# Altium PCB SUBBOARD-phase_leg_3p_2L.PcbDoc (part 2 of 2)
Units mm, origin at the board's own origin, x right, y up, seen from the top; angles counter-clockwise.
Board outline 115.25 x 128.45 mm, 2 copper layers (Top Layer, Bottom Layer), stack 1.569 mm thick; 86 components, 43 nets, 270 pads, 85 vias.
Unrouted connection lines stored in the file: 3.
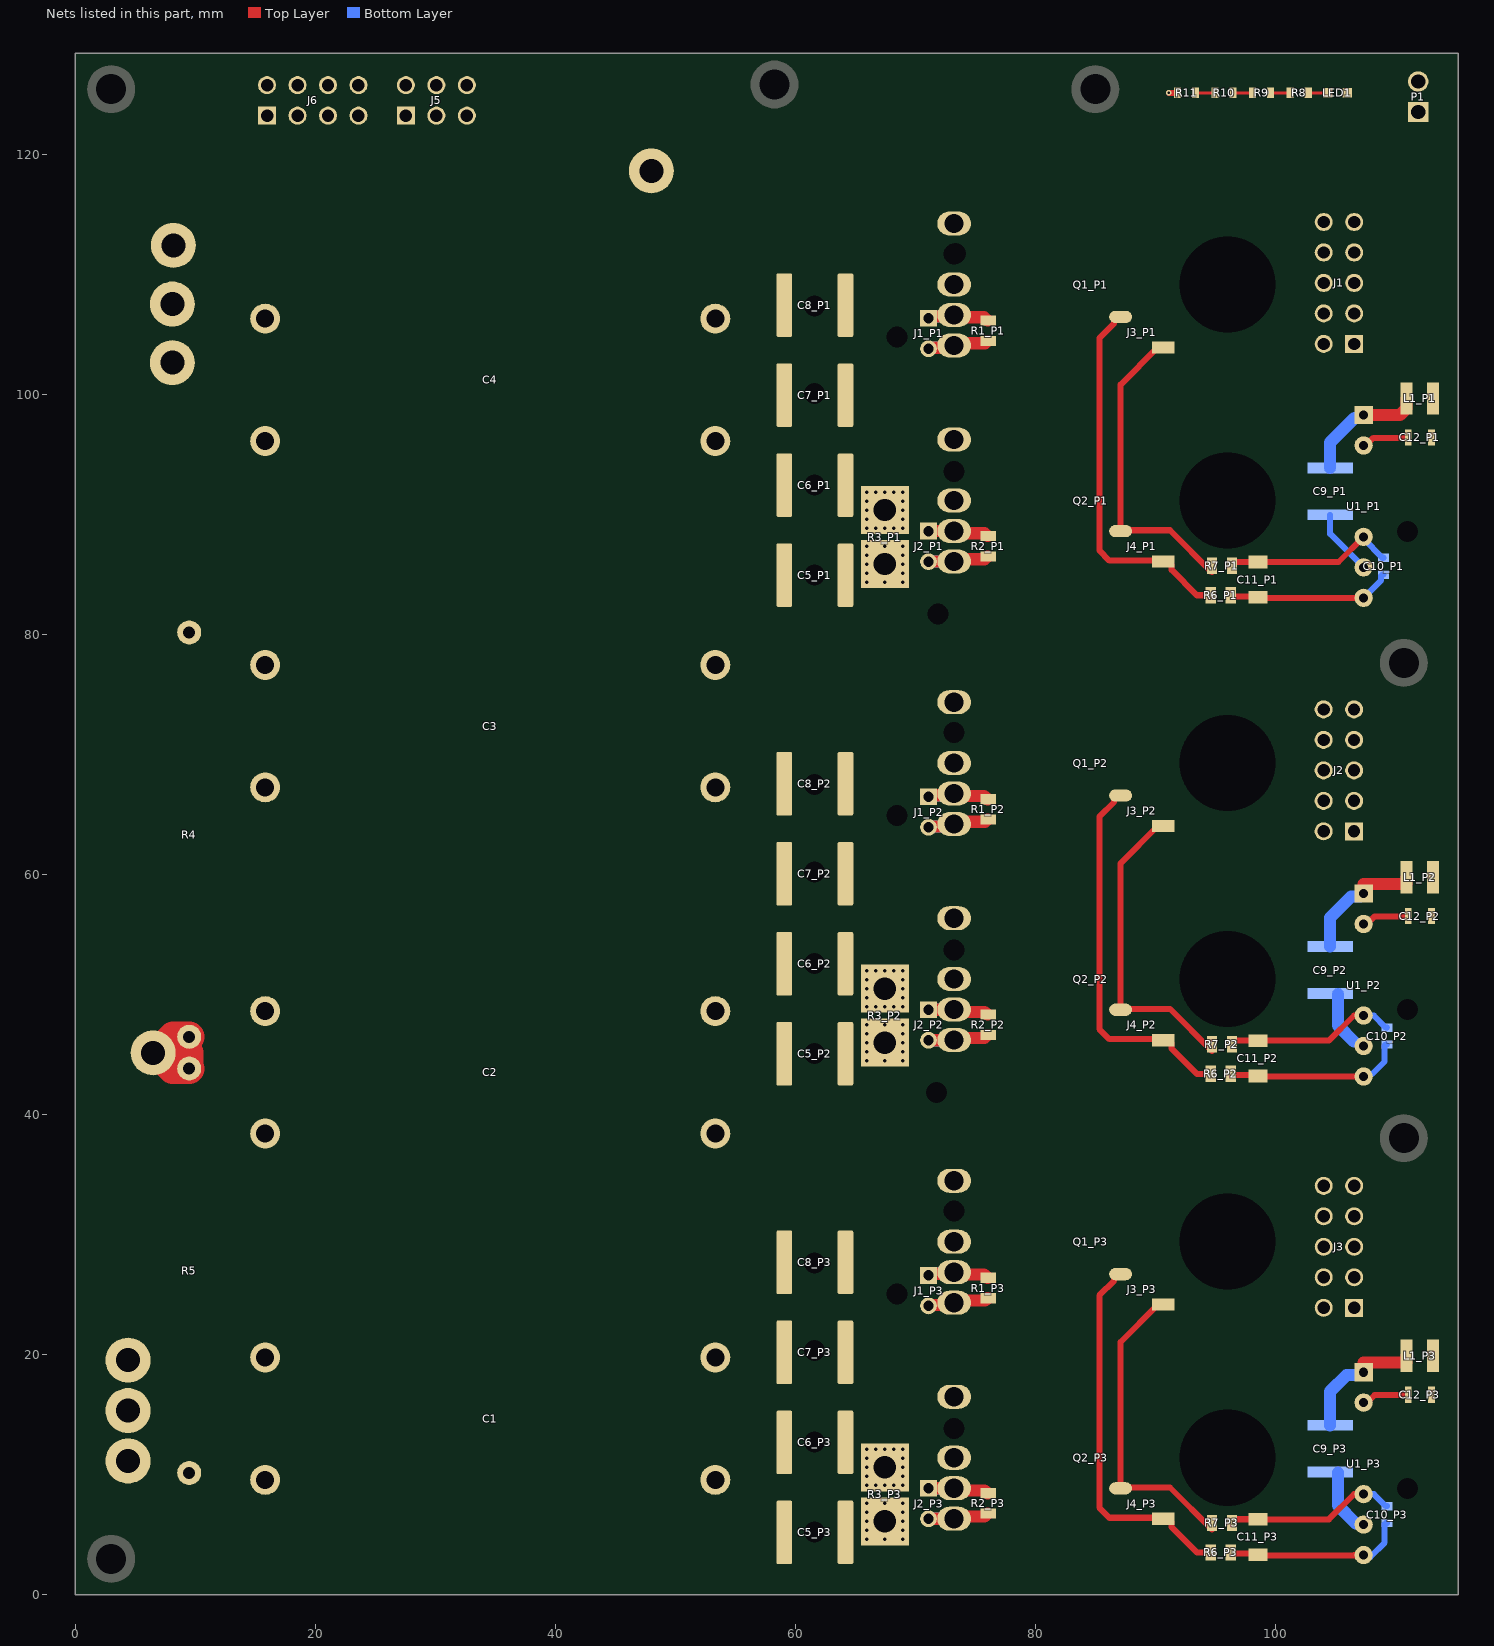
[diagram p2: the nets of this part, all layers, seen from the top]

## Part data
C1 C2 C3 C4: "Film Capacitors 5uF 5% 1000volts 4pins 37.5mm LS", Capacitance="5 uF", Manufacturer=Vishay, Supplier Part Number 1=75-MKP1848S55010JP4B, Tolerance="5 %", Voltage Rating DC="1000 V", ESR="11.5 mOhm", Number of Pins=4, Supplier 1=Mouser
C5_P1 C5_P2 C5_P3: "KEMET - C2220C102JGGACTU - KONDENSATOR 1000PF 2 KV 5% C0G/NP0 2220", Capacitance=1nF, Case Code (Imperial)=2220, Case Code (Metric)=5750, Dielectric=C0G, Dielectric Material=Ceramic, Manufacturer=KEMET, Max Operating Temperature=125°C, Min Operating Temperature=-55°C, Package Quantity=1, Supplier Part Number 1=399-7308-1-ND, Temperature Coefficient=30ppm/°C, Tolerance=5%, Voltage Rating=2kV, Case/Package=2220, Category="Ceramic Capacitors", ComponentLink1Description=https://datasheet.ciiva.com/5904/1698768-5904864.pdf?src-supplier=Farnell, ComponentLink1URL=https://datasheet.ciiva.com/5904/1698768-5904864.pdf?src-supplier=Farnell, ComponentLink2Description=https://datasheet.ciiva.com/7807/1698768-7807429.pdf?src-supplier=Element14, ComponentLink2URL=https://datasheet.ciiva.com/7807/1698768-7807429.pdf?src-supplier=Element14, ComponentLink3Description=https://datasheet.ciiva.com/7807/1698768-7807430.pdf?src-supplier=Element14, ComponentLink3URL=https://datasheet.ciiva.com/7807/1698768-7807430.pdf?src-supplier=Element14, Depth=5mm, Lead Free="Lead Free", Length=0.224inch, Manufacturer Part Number=C2220C102JGGACTU, Mount="Surface Mount", Packaging="Cut Tape", Pricing 1="1=4,95000, 10=4,45600, 50=3,86220, 100=3,36710, 500=2,77292 (USD)", REACH SVHC="No SVHC", RoHS=Yes, Stock 1=706, Supplier 1=Digi-Key, Supplier 2=Digi-Key, Supplier 3=Newark, Supplier 4=Mouser, Supplier 5=Arrow, Supplier 6=Newark, Supplier 7=Farnell, Supplier Part Number 2=399-7308-6-ND, Supplier Part Number 3=08R5595, Supplier Part Number 4=80-C2220C102JGG, Supplier Part Number 5=C2220C102JGGACTU, Supplier Part Number 6=67R5592, Supplier Part Number 7=1702176, Thickness=0.071inch, Voltage Rating (DC)=2kV, Width=0.197inch
C6_P1 C6_P2 C6_P3: "Cap Ceramic 0.01uF 1000V X7R 10% SMD 2220 125C Plastic T/R", Capacitance=10nF, Case Code (Imperial)=2220, Case Code (Metric)=5750, Dielectric=X7R, Dielectric Material=Ceramic, Manufacturer=KEMET, Max Operating Temperature=125°C, Min Operating Temperature=-55°C, Package Quantity=1, Supplier Part Number 1=399-7309-1-ND, Tolerance=10%, Voltage Rating=1kV, Case/Package=2220, Category="Ceramic Capacitors", ComponentLink1Description=https://datasheet.ciiva.com/7807/1499186-7807431.pdf?src-supplier=Element14, ComponentLink1URL=https://datasheet.ciiva.com/7807/1499186-7807431.pdf?src-supplier=Element14, ComponentLink2Description=https://datasheet.ciiva.com/7807/1499186-7807432.pdf?src-supplier=Element14, ComponentLink2URL=https://datasheet.ciiva.com/7807/1499186-7807432.pdf?src-supplier=Element14, Depth=5mm, Height=1.4mm, Length=0.224inch, Manufacturer Part Number=C2220C103KDRACTU, Mount="Surface Mount", Packaging="Cut Tape", Pricing 1="1=4,39000, 10=3,54400, 50=3,04760, 100=2,76400, 500=2,05532 (USD)", REACH SVHC="No SVHC", RoHS=Yes, Stock 1=4957, Supplier 1=Digi-Key, Supplier 2=Digi-Key, Supplier 3=Digi-Key, Supplier 4=Newark, Supplier 5=Mouser, Supplier 6=Arrow, Supplier 7=Farnell, Supplier Part Number 2=399-7309-6-ND, Supplier Part Number 3=399-7309-2-ND, Supplier Part Number 4=08R5596, Supplier Part Number 5=80-C2220C103KDR, Supplier Part Number 6=C2220C103KDRACTU, Supplier Part Number 7=1702182, Thickness=0.061inch, Voltage Rating (DC)=1kV, Width=0.197inch
C7_P1 C7_P2 C7_P3 C8_P1 C8_P2 C8_P3: "CAP CER 0.1UF 1KV X7R 2220", Capacitance=100nF, Case Code (Imperial)=2220, Case Code (Metric)=5750, Dielectric=X7R, Dielectric Material=Ceramic, Manufacturer=KEMET, Max Operating Temperature=125°C, Min Operating Temperature=-55°C, Package Quantity=500, Supplier Part Number 1=399-10490-1-ND, Tolerance=10%, Voltage Rating=1kV, Case/Package=2220, Category="Ceramic Capacitors", ComponentLink1Description=http://www.farnell.com/datasheets/2316241.pdf?src-supplier=Farnell, ComponentLink1URL=http://www.farnell.com/datasheets/2316241.pdf?src-supplier=Farnell, ComponentLink2Description=http://www.mouser.com/ds/2/212/KEM_C1010_X7R_HV_SMD-345925.pdf?src-supplier=Mouser, ComponentLink2URL=http://www.mouser.com/ds/2/212/KEM_C1010_X7R_HV_SMD-345925.pdf?src-supplier=Mouser, ComponentLink3Description=http://www.kemet.com/docfinder?Partnumber=C2220C104KDRACTU&src-supplier=Digi-Key, ComponentLink3URL=http://www.kemet.com/docfinder?Partnumber=C2220C104KDRACTU&src-supplier=Digi-Key, ComponentLink4Description=https://api.kemet.com/component-edge/download/datasheet/C2220C104KDRACTU.pdf?src-supplier=Digi-Key, ComponentLink4URL=https://api.kemet.com/component-edge/download/datasheet/C2220C104KDRACTU.pdf?src-supplier=Digi-Key, ComponentLink5Description=http://www.kemet.com/Lists/ProductCatalog/Attachments/53/KEM_C1002_X7R_SMD.pdf?src-supplier=Avnet, ComponentLink5URL=http://www.kemet.com/Lists/ProductCatalog/Attachments/53/KEM_C1002_X7R_SMD.pdf?src-supplier=Avnet, Length=0.224inch, Manufacturer Part Number=C2220C104KDRACTU, Mount="Surface Mount", Packaging="Tape and Reel", Pricing 1="1=1,15000, 10=0,90600, 50=0,78500, 100=0,67940 (USD)", RoHS=Yes, Stock 1=1165, Supplier 1=Digi-Key, Supplier 2=Digi-Key, Supplier 3=Digi-Key, Supplier 4=Avnet, Supplier 5=Mouser, Supplier 6=Newark, Supplier 7=Arrow, Supplier 8=Farnell, Supplier Part Number 2=399-10490-6-ND, Supplier Part Number 3=399-10490-2-ND, Supplier Part Number 4=C2220C104KDRACTU, Supplier Part Number 5=80-C2220C104KDR, Supplier Part Number 6=05AC8309, Supplier Part Number 7=C2220C104KDRACTU, Supplier Part Number 8=2676644, Termination=SMD/SMT, Thickness=0.087inch, Voltage Rating (DC)=1kV, Width=0.197inch
C9_P1 C9_P2 C9_P3: "CAP CER 470PF 250VAC X7R 1812", Capacitance=470pF, Case Code (Imperial)=1812, Case Code (Metric)=4532, Manufacturer="Wurth Electronics", Max Operating Temperature=125°C, Min Operating Temperature=-55°C, Ratings=X1,Y2, Supplier Part Number 1=710-885352211001, Tolerance=10%, Case/Package=1812, Category="Ceramic Capacitors", ComponentLink1Description=https://katalog.we-online.de/pbs/datasheet/885352211001.pdf?src-supplier=Digi-Key, ComponentLink1URL=https://katalog.we-online.de/pbs/datasheet/885352211001.pdf?src-supplier=Digi-Key, Length=0.177inch, Manufacturer Part Number=885352211001, Mount="Surface Mount", Packaging="Cut Tape", Pricing 1="1=0,74000, 25=0,73600, 50=0,60400, 100=0,51200, 250=0,43700, 500=0,36700 (USD)", RoHS=Yes, Stock 1=1066, Supplier 1=Mouser, Supplier 2=Digi-Key, Supplier 3=Digi-Key, Supplier 4=Digi-Key, Supplier Part Number 2=732-8853522110011CT-ND, Supplier Part Number 3=732-8853522110011DKR-ND, Supplier Part Number 4=732-8853522110011TR-ND, Thickness=0.071inch, Width=0.125inch
C10_P1 C10_P2 C10_P3: library part CMP-1035-02591-1, "CAP 100nF 50V ±5% 0603 (1608 Metric) Thickness 1mm SMD", Case-EIA=0603, Case-Metric=1608, Rated Voltage="50 V", Tolerance=Â±5%, Max Thickness="1 mm", Technology=SMT
C11_P1 C11_P2 C11_P3: library part CMP-06035-000076-1, "CAP CER 10UF 50V X5R 1206", Capacitance=10uF, Manufacturer=Murata, Package=GRT31-0.2, Temperature="-55°C to +85°C", Temperature Characteristic=X5R, Temperature Coefficient=15%, Temperature Range High=+85°C, Temperature Range Low=-55°C, Tolerance=10%, Voltage Rating=50V, Automotive=Yes, Automotive Grade="Grade 3", Category=Cap, ComponentLink2Description=Datasheet, ComponentLink2URL=https://search.murata.co.jp/Ceramy/image/img/A01X/G101/ENG/GRT31CR61H106KE01-01.pdf, Device Class L1="Passive Components", Device Class L2=Capacitors, Device Class L3="Ceramic Capacitors", Digikey Description="CAP CER 10UF 50V X5R 1206", Height=1.8mm, Ipc Land Pattern Name=CAPC320160X160, Lead Free=Yes, Manufacturer Part Number=GRT31CR61H106KE01L, Material=Ceramic, Octopart=https://octopart.com/grt31cr61h106ke01l-murata-62921736, RoHS=TRUE
C12_P1 C12_P2 C12_P3: library part CMP-2000-06040-1, "Chip Capacitor, 2.2 uF, +/- 10%, 50 V, -55 to 125 degC, 0805 (2012 Metric), RoHS, Tape and Reel", Capacitance=2.2µF, Manufacturer=TDK, Operating Temperature=-55°C~125°C, Package / Case=0805(2012Metric), Package Description="2-Pin Surface Mount Device, Body 2 x 1.25 mm", Package Reference=0805, PCN Part Number=MLCCPartNumberChange30/Nov/2012, Ratings=-, Standard Package=1, Temperature Coefficient=X7R, Tolerance=±10%, Voltage - Rated=50V, Applications=GeneralPurpose, Catalog Drawings=CSERIES_2012-0805_1.45, Category=Capacitors, Datasheet URL=https://datasheet.ciiva.com/24216/c2012x7r1h225k125ac-265016-24216364.pdf, Datasheet Version=09/2013, Family=CeramicCapacitors, Features=-, Height - Seated (Max)=-, Kits=445-9015-KIT-ND-KITMLCC1000PF-47UF080510-50V445-9003-KIT-ND-KITCAPCERHICAPMLCCSMD445-173086-KIT-ND-C0402-2220X7R6.3-50V1,000PF-, Lead Spacing=-, Lead Style=-, Manufacturer URL=http://www.tdk.com/, Mounting Technology=SurfaceMount, Mounting Type=SurfaceMount,MLCC, Online Catalog=CSeries,GeneralPurpose, Other Names=445-5968-1, Packaging=CutTape(CT), Product Training Modules=CSeriesGeneralApplicationsSEAT,CCV,andTVCLDesignToolsGuidetoReplacinganElectrolyticCapacitorwithanMLCC, RoHS Information=RoHSCertificate-MLCC, Series=C, Size / Dimension="0.079\"Lx0.049\"W(2.00mmx1.25mm)", Thickness (Max)="0.057\"(1.45mm)"
J1 J2 J3: "SAMTEC         IPS1-105-01-L-D-RA             Board-To-Board Connector, Right Angle, IPS1 Series, 10 Contacts, Receptacle, 2.54 mm, Through Hole", Current Rating=9A, Manufacturer=Samtec, Max Operating Temperature=125°C, Max Voltage Rating (AC)=550V, Min Operating Temperature=-55°C, Supplier Part Number 1=SAM9620-ND, Voltage Rating=777V, Category=Connectors, ComponentLink1Description=https://datasheet.ciiva.com/25618/0900766b8114c2ed-25618027.pdf?src-supplier=RSComponents, ComponentLink1URL=https://datasheet.ciiva.com/25618/0900766b8114c2ed-25618027.pdf?src-supplier=RSComponents, ComponentLink2Description=https://datasheet.ciiva.com/9444/ipt1-9444586.pdf?src-supplier=Avnet, ComponentLink2URL=https://datasheet.ciiva.com/9444/ipt1-9444586.pdf?src-supplier=Avnet, Contact Material=Bronze, Contact Plating=Gold, Depth=8.51mm, Gender=Receptacle, Housing Material=Polymer, Length=13.08mm, Manufacturer Part Number=IPS1-105-01-L-D-RA, Mount="Through Hole,Surface Mount", Number of Contacts=10, Number of Ports=1, Number of Rows=2, Number of Terminals=10, Orientation="Right Angle", Packaging=Bulk, Pitch=2.54mm, Pricing 1="1=2.75000, 10=2.64000, 100=2.20000, 500=1.87000, 1000=1.59500, 5000=1.43000 (USD)", Radiation Hardening=No, REACH SVHC="No SVHC", RoHS=Yes, Stock 1=364, Supplier 1=Digi-Key, Termination=Solder
J1_P1 J1_P2 J1_P3 J2_P1 J2_P2 J2_P3: library part CMP-1023-00124-1, "Low Profile Socket Strips, Through-hole, Vertical, -55 to 105 degC, 2.54 mm Pitch, 2-Pin, Female, RoHS", Manufacturer=Samtec, Temperature Range="-55 to 105 degC", ComponentLink1Description="Manufacturer URL", ComponentLink1URL=http://www.samtec.com, ComponentLink2Description=Datasheet, ComponentLink2URL=http://www.samtec.com/documents/webfiles/pdf/SLW.PDF, ComponentLink3Description="Package Specification", ComponentLink3URL=http://www.samtec.com/documents/webfiles/cpdf/SLW-1XX-01-X-X-MKT.pdf, DatasheetVersion=F-214, Mounting Technology=Through-hole, Orientation=Vertical, PackageDescription="Low Profile Socket Strip", PackageReference=SLW-102-01-X-S, PackageVersion="X, 9/1987", PartNumber=SLW-102-01-T-S, Pitch="2.54 mm", RoHS=True, System=Connector
J3_P1 J3_P2 J3_P3 J4_P1 J4_P2 J4_P3: "SAMTEC - SSM-102-L-SV - RECEPTACLE, 2.54MM, VERT, 2WAY", Color=Black, Contact Resistance=10mR, Current Rating=6.9A, Manufacturer=Samtec, Max Operating Temperature=125°C, Max Voltage Rating (AC)=475V, Min Operating Temperature=-55°C, Supplier Part Number 1=SAM1148-02-ND, Category="Headers and Wire Housings", ComponentLink1Description=https://datasheet.ciiva.com/25617/0900766b811594ab-25617394.pdf?src-supplier=RSComponents, ComponentLink1URL=https://datasheet.ciiva.com/25617/0900766b811594ab-25617394.pdf?src-supplier=RSComponents, ComponentLink2Description=https://datasheet.ciiva.com/746/ssm-1xx-xxx-xx-xx-xx-x-xx-xx-mkt-746741.pdf?src-supplier=Digi-Key, ComponentLink2URL=https://datasheet.ciiva.com/746/ssm-1xx-xxx-xx-xx-xx-x-xx-xx-mkt-746741.pdf?src-supplier=Digi-Key, ComponentLink3Description=https://datasheet.ciiva.com/22677/81944-22677814.pdf?src-supplier=Element14, ComponentLink3URL=https://datasheet.ciiva.com/22677/81944-22677814.pdf?src-supplier=Element14, Connector Type=Receptacle,Socket, Contact Material=Bronze, Contact Plating=Gold, Depth=2.54mm, Gender=Receptacle, Housing Color=Black, Housing Material=Polymer, Lead Free="Lead Free", Lead Pitch=2.54mm, Length=5.08mm, Manufacturer Part Number=SSM-102-L-SV, Max Current Rating=6.9A, Mount="Surface Mount", Number of Contacts=2, Number of Positions=2, Number of Rows=1, Orientation=Straight, Packaging=Bulk, Pitch=2.54mm, Pricing 1="1=0.56000, 10=0.52100, 25=0.46920, 50=0.41700, 100=0.39960, 250=0.36488, 500=0.34752 (USD)", Pricing 2="1=0.53350, 1=0.47880, 12500=0.42240, 25000=0.36600, 125000=0.31770, 250000=0.29990 (USD)", Pricing 3="1=0.92000, 10=0.73100, 100=0.63600, 500=0.57200, 1000=0.50800, 2500=0.44500 (USD)", Radiation Hardening=No, REACH SVHC="No SVHC", RoHS=Yes, Stock 1=51, Stock 2=1, Stock 3=175, Supplier 1=Digi-Key, Supplier 2=Arrow, Supplier 3=Mouser, Supplier Part Number 2=SSM-102-L-SV, Supplier Part Number 3=200-SSM102LSV, System=Connector, Termination=Solder, Voltage Rating=475V, Voltage Rating (AC)=475V
J5: "Conn Socket Strip SKT 6 POS 2.54mm Solder ST Thru-Hole", Color=Black, Contact Resistance=10mR, Current Rating=6.9A, Manufacturer=Samtec, Max Operating Temperature=125°C, Max Voltage Rating (AC)=550V, Min Operating Temperature=-55°C, Supplier Part Number 1=SAM1208-03-ND, Category="Headers and Wire Housings", ComponentLink1Description=https://datasheet.ciiva.com/25617/0900766b8115c03d-25617399.pdf?src-supplier=RSComponents, ComponentLink1URL=https://datasheet.ciiva.com/25617/0900766b8115c03d-25617399.pdf?src-supplier=RSComponents, ComponentLink2Description=https://datasheet.ciiva.com/22677/82032-22677622.pdf?src-supplier=Element14, ComponentLink2URL=https://datasheet.ciiva.com/22677/82032-22677622.pdf?src-supplier=Element14, ComponentLink3Description=https://datasheet.ciiva.com/749/ssw-1xx-xx-xxx-x-xx-xxx-xx-mkt-749828.pdf?src-supplier=Digi-Key, ComponentLink3URL=https://datasheet.ciiva.com/749/ssw-1xx-xx-xxx-x-xx-xxx-xx-mkt-749828.pdf?src-supplier=Digi-Key, Connector Type=Receptacle,Socket, Contact Material=Bronze, Contact Plating=Gold, Depth=4.95mm, Gender=Receptacle, Housing Color=Black, Housing Material=Polymer, Lead Free="Lead Free", Length=8.13mm, Manufacturer Part Number=SSW-103-01-G-D, Mating Cycles=100, Max Current Rating=6.9A, Mount="Through Hole", Number of Contacts=6, Number of Positions=6, Number of Rows=2, Orientation=Vertical, Packaging=Bulk, Pitch=2.54mm, Pricing 1="1=0.93000, 10=0.82100, 25=0.77240, 50=0.74020, 100=0.70800, 250=0.64368, 500=0.57932 (USD)", Pricing 2="1=0.94640, 1=0.93000, 4167=0.71590, 8334=0.59720, 41667=0.52200, 83334=0.49330 (USD)", Pricing 3="1=1.35000, 10=1.10000, 100=0.98200, 250=0.91700, 500=0.79200, 1000=0.69000 (USD)", Radiation Hardening=No, REACH SVHC="No SVHC", RoHS=Yes, Row Spacing=0.1inch, Stock 1=1397, Stock 2=1, Stock 3=388, Supplier 1=Digi-Key, Supplier 2=Arrow, Supplier 3=Mouser, Supplier Part Number 2=SSW-103-01-G-D, Supplier Part Number 3=200-SSW10301GD, Termination=Solder, Voltage Rating=550V
J6: "Conn Socket Strip SKT 8 POS 2.54mm Solder ST Thru-Hole", Color=Black, Contact Resistance=10mR, Current Rating=6.9A, Manufacturer=Samtec, Max Operating Temperature=125°C, Max Voltage Rating (AC)=550V, Min Operating Temperature=-55°C, Supplier Part Number 1=SAM1208-04-ND, Category="Headers and Wire Housings", ComponentLink1Description=https://datasheet.ciiva.com/25617/0900766b8115c03d-25617355.pdf?src-supplier=RSComponents, ComponentLink1URL=https://datasheet.ciiva.com/25617/0900766b8115c03d-25617355.pdf?src-supplier=RSComponents, ComponentLink2Description=https://datasheet.ciiva.com/22677/82032-22677624.pdf?src-supplier=Element14, ComponentLink2URL=https://datasheet.ciiva.com/22677/82032-22677624.pdf?src-supplier=Element14, ComponentLink3Description=https://datasheet.ciiva.com/749/ssw-1xx-xx-xxx-x-xx-xxx-xx-mkt-749827.pdf?src-supplier=Digi-Key, ComponentLink3URL=https://datasheet.ciiva.com/749/ssw-1xx-xx-xxx-x-xx-xxx-xx-mkt-749827.pdf?src-supplier=Digi-Key, Connector Type=Receptacle,Socket, Contact Material=Bronze, Contact Plating=Gold, Depth=4.95mm, Gender=Receptacle, Housing Color=Black, Housing Material=Polymer, Lead Free="Lead Free", Length=10.67mm, Manufacturer Part Number=SSW-104-01-G-D, Mating Cycles=100, Max Current Rating=6.9A, Mount="Through Hole", Number of Contacts=8, Number of Positions=8, Number of Rows=2, Orientation=Vertical, Packaging=Bulk, Pitch=2.54mm, Pricing 1="1=1.24000, 10=1.09400, 25=1.03000, 50=0.98700, 100=0.94410, 250=0.85824, 500=0.77242 (USD)", Radiation Hardening=No, REACH SVHC="No SVHC", RoHS=Yes, Row Spacing=0.1inch, Stock 1=1152, Supplier 1=Digi-Key, Termination=Solder, Voltage Rating=550V
L1_P1 L1_P2 L1_P3: library part CMP-0007-00006-1, "Semi-shielded Power Inductor, 47 uH, +/- 20%, 0.4 A, -40 to 125 degC, 3 x 3 x 1.5 mm SMD, RoHS and Halogen Free, Tape and Reel", Inductance="47 uH", Inductance Tolerance="+/- 20%", Manufacturer=Bourns, Operating Temperature="-40 to 125 degC", Rated Current="0.4 A", Resistance to Solder Heat="+260 degC for 10 sec.", ComponentLink1Description="Manufacturer URL", ComponentLink1URL=http://www.bourns.com/, ComponentLink2Description=Datasheet, ComponentLink2URL=http://www.bourns.com/data/global/pdfs/SRN3015.pdf, ComponentLink3Description="Package Specification", ComponentLink3URL=http://www.bourns.com/data/global/pdfs/SRN3015.pdf, DatasheetVersion=Aug-11, DCR Max="1.406 Ohm", Isat="0.38 A", Mounting Technology="Surface Mount", PackageDescription="2-Pin SMD, Body 3 x 3 mm, Height 1.5 mm", PackageReference=SRN3015, Packing="Tape and Reel", PartNumber=SRN3015-470M, RoHS=TRUE, SRF Min="18 MHz"
LED1: library part CMP-1426-00003-1, "SMD mono-color Chip LED, WL-SMCW, Blue", Color=Blue, Manufacturer="Wuerth Elektronik", ComponentLink1Description="Manufacturer URL", ComponentLink1URL=http://www.we-online.com, ComponentLink2Description=Datasheet, ComponentLink2URL=http://katalog.we-online.com/led/datasheet/150060BS75000.pdf, PackageReference=0603_A, PartNumber=150060BS75000
MH1 MH2 MH3 MH4 MH5 MH6: "matching hole 2.5 hole, 4mm pad (round)"
P1: library part CMP-2000-05537-1, "Male Header, Pitch 2.54 mm, 1 x 2 Position, Height 11.7 mm, Tail Length 3.56 mm, 0 to 75 degC, RoHS, Bulk", Current - Max=4A, Manufacturer=Molex, Operating Temperature=0°Cto+75°C, Package Description="2-Leads Header, Body 5.08 x 5.8 mm, Pitch 2.54 mm", Package Version="Rev. BC, 02/2012", PartNumber=0022272021, Voltage - Max=250V, Contact Material=Tinplatedbrass, Current Rating=4A, Datasheet URL=http://www.molex.com/pdm_docs/sd/022272021_sd.pdf, Datasheet Version="Rev. F, 06/2009", Housing Material=Nylon(UL94V-0), Manufacturer URL=http://www.molex.com/, Mounting Technology=ThroughHole, No. of Positions=2, No. of Rows=1, Orientation=Vertical, Package Reference=22-27-2021, Pitch=2.54mm, Voltage Rating=250V
Q1_P1 Q1_P2 Q1_P3 Q2_P1 Q2_P2 Q2_P3: "N-channel SiC power MOSFET ROHM. Vdss 1200V, Rdson 105mOhm, Id 24A", Current - Continuous Drain (Id) @ 25°C="24 A", Drain-to-source voltage (Vdss)="1200 V", Drive Voltage="18 V", Input Capacitance (Ciss) (Max) @ Vds="574pF @ 800V", Package/Case=TO-247-4, Supplier Part Number 1=755-SCT3105KRC14, FET Type=N-Channel, Gate Charge (Qg) (Max) @ Vds="51 nC", Rds on @ Id, Vgs="137 mOhm", Supplier 1=Mouser, Supplier 2=Digi-Key, Supplier 3=Farnell, Supplier 4=Newark, Supplier Part Number 2=846-SCT3105KRC14-ND, Supplier Part Number 3=3241766, Supplier Part Number 4=34AH2699, Technology=SiC-FET, Vgs Max="+22 V / -4 V"
R1_P1 R1_P2 R1_P3 R2_P1 R2_P2 R2_P3: library part CMP-1013-00098-1, "10K 0.125W 5% 0805 (2012 Metric)  SMD", Case-EIA=0805, Case-Metric=2012, Power="0.125 W", Tolerance="5 %", Technology=SMT
R3_P1 R3_P2 R3_P3: "Coaxial current shunt SDN-414 T&M (New)", Case/Package=Axial, Manufacturer=Ohmite, Manufacturer Part Number=WHE10RFET, Max Operating Temperature=150°C, Max Power Dissipation=5W, Min Operating Temperature=-55°C, Package Quantity=500, Resistance=10R, Supplier Part Number 1=WHE10RFETCT-ND, Temperature Coefficient=50ppm/°C, Tolerance=1%, Category="Through-Hole Resistors", ComponentLink1Description=https://datasheet.ciiva.com/5635/res-wh-wn-5635598.pdf?src-supplier=Mouser, ComponentLink1URL=https://datasheet.ciiva.com/5635/res-wh-wn-5635598.pdf?src-supplier=Mouser, ComponentLink2Description=https://datasheet.ciiva.com/6495/res-wh-wn-6495224.pdf?src-supplier=Digi-Key, ComponentLink2URL=https://datasheet.ciiva.com/6495/res-wh-wn-6495224.pdf?src-supplier=Digi-Key, ComponentLink3Description=https://datasheet.ciiva.com/6495/res-wh-wn-6495226.pdf?src-supplier=Digi-Key, ComponentLink3URL=https://datasheet.ciiva.com/6495/res-wh-wn-6495226.pdf?src-supplier=Digi-Key, Composition=Wirewound, Diameter=7.5mm, Lead Diameter=1mm, Length=20mm, Number of Pins=2, Number of Terminations=2, Packaging="Tape and Reel", Power rating=5W, Pricing 1="1=1.54000, 10=1.36400, 25=1.25400, 50=1.14400, 100=0.99000, 250=0.83600 (USD)", REACH SVHC=Unknown, RoHS=Yes, Stock 1=228, Supplier 1=Digi-Key, Termination=Axial, Weight=0.080848oz
R4 R5: "Metal Oxide Resistors 5W XSM M/OX 5% 51K", Manufacturer="TE Connectivity", Power="5 W", Supplier Part Number 1=A142841CT-ND, Tolerance="5 %", Diameter="6.5 mm", Length="17.5 mm", Manufacturer Part Number=ROX5SSJ51K, Pricing 1="1=0,66000, 10=0,54900, 25=0,47080, 50=0,42360, 100=0,36880, 250=0,32952 (USD)", RoHS=No, Stock 1=846, Supplier 1=Digi-Key, Supplier 2=Digi-Key, Supplier 3=RSComponents, Supplier 4=Mouser, Supplier 5=Farnell, Supplier Part Number 2=A142841TB-ND, Supplier Part Number 3=1869581, Supplier Part Number 4=279-ROX5SSJ51K, Supplier Part Number 5=3229952
R6_P1 R6_P2 R6_P3 R7_P1 R7_P2 R7_P3: library part CMP-2001-04896-1, Manufacturer="Vishay Dale", Part Number=CRCW08050000Z0EA
R8 R9 R10 R11: library part CRCW0603200RFKEAHP, "CRCW0603200RFKEAHP / Res Thick Film 0603 200 Ohm 1% 0.25W(1/4W) ±100ppm/C Pad SMD Automotive T/R", Case Code (Imperial)=0603, Case Code (Metric)=1608, Manufacturer="Vishay Dale", Max Operating Temperature=155°C, Max Power Dissipation=250mW, Min Operating Temperature=-55°C, Package Quantity=5000, Resistance=200R, Resistor Type="Thick Film", Supplier Part Number 1=541-200SCT-ND, Temperature Coefficient=100ppm/°C, Tolerance=1%, Case/Package=0603, Category="Chip SMD Resistors", ComponentLink1Description=https://datasheet.ciiva.com/2578/crcwhpe3-2578537.pdf?src-supplier=Digi-Key, ComponentLink1URL=https://datasheet.ciiva.com/2578/crcwhpe3-2578537.pdf?src-supplier=Digi-Key, ComponentLink2Description=https://datasheet.ciiva.com/8961/crcwhpe3-8961129.pdf?src-supplier=Avnet, ComponentLink2URL=https://datasheet.ciiva.com/8961/crcwhpe3-8961129.pdf?src-supplier=Avnet, Contact Plating=Tin, Features="Automotive AEC-Q200", Height=0.022inch, Lead Free="Lead Free", Length=0.063inch, Manufacturer Part Number=CRCW0603200RFKEAHP, Mount="Surface Mount", Number of Terminations=2, Packaging="Tape and Reel", Power rating=250mW, Pricing 1="1=0.15000, 10=0.12900, 100=0.05030, 1000=0.02106, 2500=0.01930 (USD)", Radiation Hardening=No, RoHS=Yes, Stock 1=59007, Supplier 1=Digi-Key, Width=0.033inch
U1_P1 U1_P2 U1_P3: "2W DC/DC-Converter 'ECONOLINE' SIP7 6.4kV unreg; V. In: 24; V. Out: +15/-03; mA. Out: +93/-185", Manufacturer=Recom, Max Output Voltage=15V, Supplier Part Number 1=945-3071-5-ND, Category="Voltage Regulators - Switching", Height=12.5mm, Length=19.5mm, Manufacturer Part Number=R24P21503D, Pricing 1="1=8,88000, 5=8,71200, 10=8,64500, 25=8,51200, 50=8,24600, 100=7,61000, 250=7,31500, 500=7,18200 (USD)", RoHS=No, Stock 1=358, Supplier 1=Digi-Key, Supplier 2=RSComponents, Supplier 3=Mouser, Supplier 4="Future Electronics", Supplier 5="Arrow Electronics", Supplier 6=Newark, Supplier Part Number 2=1446041, Supplier Part Number 3=919-R24P21503D, Supplier Part Number 4=R24P21503D-TUBE, Supplier Part Number 5=R24P21503D, Supplier Part Number 6=22AC6462, Weight=4.3g, Width=9.8mm

## Free pads (board coordinates)
  round 3.75 hole 2: 3(4.4,11.15) 3(4.4,15.35) 3(4.4,19.55) 3(6.5,45.16) 3(8.09,102.66) 3(8.09,107.55) 3(8.18,112.44) 3(48,118.65)
  round 0.8 hole 1.75 slot 5.9 at 90 deg unplated: *(61.583,107.384) *(61.583,5.211) *(61.583,12.728) *(61.583,20.338) *(61.583,27.63) *(61.583,45.099) *(61.583,52.616) *(61.583,60.226) *(61.583,67.518) *(61.583,84.965) *(61.583,92.482) *(61.583,100.092)
  round 0.8 hole 1.75 slot 7.8 at 90 deg unplated: *(68.469,64.918) *(68.47,104.815) *(68.471,25.051)
  round 0.8 hole 1.75 slot 11.7 at 0 deg unplated: *(71.75,41.873) *(71.875,81.742)
  round 0.8 hole 1.75 slot 7.1 at 0 deg unplated: *(73.218,71.846) *(73.224,93.597) *(73.225,53.717) *(73.229,31.965) *(73.232,13.845) *(73.24,111.725) *(73.347,111.768)
  round 0.8 hole 1.75 slot 12.8 at 90 deg unplated: *(111.022,88.595) *(111.022,8.835) *(111.022,48.749)

## Via types
v1: diameter 0.5, hole 0.3, Top Layer to Bottom Layer, 84 vias
v2: diameter 0.45, hole 0.2, Top Layer to Bottom Layer, 1 vias

## Nets (pads, with @x,y where several pads share a name; then routed paths per layer and width w, separated by ;. In a path a pad name is that pad's centre, name@x,y a point inside that pad or via, vN(x,y) a via of type N, cw(c..) or ccw(c..) an arc to the next point about the centre after c; other vN are vias at no path point)
G_N1: J2_P1.2 Q2_P1.4 R2_P1.2 | length 7.3
  Top Layer w1.016: J2_P1.2@71.102,86.09 71.106,86.094 73.227,86.094 Q2_P1.4@73.231,86.098 73.419,86.286 75.767,86.286 76.003,86.522 R2_P1.2@76.062,86.522
  Bottom Layer w1.016: J2_P1.2@71.102,86.09 71.106,86.094 73.227,86.094 Q2_P1.4@73.231,86.098
G_N2: J2_P2.2 Q2_P2.4 R2_P2.2 | length 7.3
  Top Layer w1.016: J2_P2.2@71.102,46.21 71.106,46.214 73.227,46.214 Q2_P2.4@73.231,46.218 73.419,46.406 75.767,46.406 76.003,46.642 R2_P2.2@76.062,46.642
  Bottom Layer w1.016: J2_P2.2@71.102,46.21 71.106,46.214 73.227,46.214 Q2_P2.4@73.231,46.218
G_N3: J2_P3.2 Q2_P3.4 R2_P3.2 | length 7.3
  Top Layer w1.016: J2_P3.2@71.102,6.33 71.106,6.334 73.227,6.334 Q2_P3.4@73.231,6.338 73.419,6.526 75.767,6.526 76.003,6.762 R2_P3.2@76.062,6.762
  Bottom Layer w1.016: J2_P3.2@71.102,6.33 71.106,6.334 73.227,6.334 Q2_P3.4@73.231,6.338
G_P1: J1_P1.2 Q1_P1.4 R1_P1.1 | length 7.5
  Top Layer w1.016: J1_P1.2@71.102,103.833 71.175,103.906 72.373,103.906 72.565,104.098 Q1_P1.4@73.231,104.098 73.419,104.286 75.817,104.286 76.003,104.472 R1_P1.1@76.062,104.472
  Bottom Layer w1.016: J1_P1.2@71.102,103.833 71.175,103.906 72.373,103.906 72.565,104.098 Q1_P1.4@73.231,104.098
G_P2: J1_P2.2 Q1_P2.4 R1_P2.1 | length 7.5
  Top Layer w1.016: J1_P2.2@71.102,63.953 71.175,64.026 72.373,64.026 72.565,64.218 Q1_P2.4@73.231,64.218 73.419,64.406 75.817,64.406 76.003,64.592 R1_P2.1@76.062,64.592
  Bottom Layer w1.016: J1_P2.2@71.102,63.953 71.175,64.026 72.373,64.026 72.565,64.218 Q1_P2.4@73.231,64.218
G_P3: J1_P3.2 Q1_P3.4 R1_P3.1 | length 7.5
  Top Layer w1.016: J1_P3.2@71.102,24.073 71.175,24.146 72.373,24.146 72.565,24.338 Q1_P3.4@73.231,24.338 73.419,24.526 75.817,24.526 76.003,24.712 R1_P3.1@76.062,24.712
  Bottom Layer w1.016: J1_P3.2@71.102,24.073 71.175,24.146 72.373,24.146 72.565,24.338 Q1_P3.4@73.231,24.338
GND: C12_P1.2 C12_P2.2 C12_P3.2 P1.1 R11.2 U1_P1.2 U1_P2.2 U1_P3.2 | length 12.7
  Top Layer w0.5: v2(91.125,125.15) R11.2@91.85,125.15 ; U1_P3.2@107.355,16.008 107.632,16.008 108.274,16.65 111.038,16.65 C12_P3.2@111.06,16.672 ; U1_P2.2@107.355,55.888 107.632,55.888 108.244,56.5 111.035,56.5 111.06,56.525 C12_P2.2@111.06,56.552 ; U1_P1.2@107.355,95.768 107.53,95.768 108.16,96.398 111.035,96.398 111.035,96.407 C12_P1.2@111.06,96.432
KS_N1: J2_P1.1 Q2_P1.3 R2_P1.1 | length 7.3
  Top Layer w1.016: J2_P1.1@71.102,88.63 71.106,88.634 73.227,88.634 Q2_P1.3@73.231,88.638 73.419,88.45 75.775,88.45 76.003,88.222 R2_P1.1@76.062,88.222
  Bottom Layer w1.016: J2_P1.1@71.102,88.63 71.106,88.634 73.227,88.634 Q2_P1.3@73.231,88.638
KS_N2: J2_P2.1 Q2_P2.3 R2_P2.1 | length 7.3
  Top Layer w1.016: J2_P2.1@71.102,48.75 71.106,48.754 73.227,48.754 Q2_P2.3@73.231,48.758 73.419,48.57 75.775,48.57 76.003,48.342 R2_P2.1@76.062,48.342
  Bottom Layer w1.016: J2_P2.1@71.102,48.75 71.106,48.754 73.227,48.754 Q2_P2.3@73.231,48.758
KS_N3: J2_P3.1 Q2_P3.3 R2_P3.1 | length 7.3
  Top Layer w1.016: J2_P3.1@71.102,8.87 71.106,8.874 73.227,8.874 Q2_P3.3@73.231,8.878 73.419,8.69 75.775,8.69 76.003,8.462 R2_P3.1@76.062,8.462
  Bottom Layer w1.016: J2_P3.1@71.102,8.87 71.106,8.874 73.227,8.874 Q2_P3.3@73.231,8.878
KS_P1: J1_P1.1 Q1_P1.3 R1_P1.2 | length 7.5
  Top Layer w1.016: J1_P1.1@71.102,106.373 71.234,106.506 73.098,106.506 Q1_P1.3@73.231,106.638 73.419,106.45 75.725,106.45 76.003,106.172 R1_P1.2@76.062,106.172
  Bottom Layer w1.016: J1_P1.1@71.102,106.373 71.234,106.506 73.098,106.506 Q1_P1.3@73.231,106.638
KS_P2: J1_P2.1 Q1_P2.3 R1_P2.2 | length 7.5
  Top Layer w1.016: J1_P2.1@71.102,66.493 71.234,66.626 73.098,66.626 Q1_P2.3@73.231,66.758 73.419,66.57 75.725,66.57 76.003,66.292 R1_P2.2@76.062,66.292
  Bottom Layer w1.016: J1_P2.1@71.102,66.493 71.234,66.626 73.098,66.626 Q1_P2.3@73.231,66.758
KS_P3: J1_P3.1 Q1_P3.3 R1_P3.2 | length 7.5
  Top Layer w1.016: J1_P3.1@71.102,26.613 71.234,26.746 73.098,26.746 Q1_P3.3@73.231,26.878 73.419,26.69 75.725,26.69 76.003,26.412 R1_P3.2@76.062,26.412
  Bottom Layer w1.016: J1_P3.1@71.102,26.613 71.234,26.746 73.098,26.746 Q1_P3.3@73.231,26.878
NetLED1_1: LED1.1 R8.1 | length 1.6
  Top Layer w0.254: R8.1@102.75,125.15 LED1.1@104.375,125.15
NetR4_1: pad.3@6.5,45.16 R4.1 R5.2 | length 10.7
  Top Layer w2.54: pad.3@6.5,45.16 pad.3@6.827,45.16 ; R5.2@9.401,43.949 9.401,45.16 ; R5.2@9.5,43.85 8.137,43.85 pad.3@6.827,45.16 ; R4.1@9.5,46.493 8.16,46.493 pad.3@6.827,45.16
  Bottom Layer w1.016: R4.1@9.302,46.493 9.401,46.394 9.401,43.949 R5.2@9.5,43.85
NetR8_2: R8.2 R9.1 | length 1.6
  Top Layer w0.254: R9.1@99.605,125.15 R8.2@101.25,125.15
NetR9_2: R9.2 R10.1 | length 1.6
  Top Layer w0.254: R10.1@96.475,125.15 R9.2@98.105,125.15
NetR10_2: R10.2 R11.1 | length 1.6
  Top Layer w0.254: R11.1@93.35,125.15 R10.2@94.975,125.15
Ph1: J1.1 J1.2 J1.3 J1.4 J1.5 J1.6 J1.7 J1.8 J1.9 J1.10 Q1_P1.2 Q2_P1.1
Ph2: J2.1 J2.2 J2.3 J2.4 J2.5 J2.6 J2.7 J2.8 J2.9 J2.10 Q1_P2.2 Q2_P2.1
Ph3: J3.1 J3.2 J3.3 J3.4 J3.5 J3.6 J3.7 J3.8 J3.9 J3.10 Q1_P3.2 Q2_P3.1
SShunt1: Q2_P1.2 R3_P1.1
  other v1: 65.957,88.881 66.707,88.881 67.457,88.881 68.207,88.881 68.957,88.881 65.957,89.631 68.957,89.631 65.957,90.381 68.957,90.381 65.957,91.131 68.957,91.131 65.957,91.881 66.707,91.881 67.457,91.881 68.207,91.881 68.957,91.881
SShunt2: Q2_P2.2 R3_P2.1
  other v1: 65.957,49.001 66.707,49.001 67.457,49.001 68.207,49.001 68.957,49.001 65.957,49.751 68.957,49.751 65.957,50.501 68.957,50.501 65.957,51.251 68.957,51.251 65.957,52.001 66.707,52.001 67.457,52.001 68.207,52.001 68.957,52.001
SShunt3: Q2_P3.2 R3_P3.1
  other v1: 65.957,9.121 66.707,9.121 67.457,9.121 68.207,9.121 68.957,9.121 65.957,9.871 68.957,9.871 65.957,10.621 68.957,10.621 65.957,11.371 68.957,11.371 65.957,12.121 66.707,12.121 67.457,12.121 68.207,12.121 68.957,12.121
VCC_24V: C12_P1.1 C12_P2.1 C12_P3.1 L1_P1.1 L1_P2.1 L1_P3.1 LED1.2 P1.2 | length 0.3
  Top Layer w0.254: LED1.2@105.975,125.15 LED1.2@106.2,124.925
VDCi_N: C1.2 C2.2 C3.2 C4.2 C5_P1.1 C5_P2.1 C5_P3.1 C6_P1.1 C6_P2.1 C6_P3.1 C7_P1.1 C7_P2.1 C7_P3.1 C8_P1.1 C8_P2.1 C8_P3.1 pad.3@4.4,11.15 pad.3@4.4,15.35 pad.3@4.4,19.55 R3_P1.2 R3_P2.2 R3_P3.2 R5.1
  other v1: 65.957,4.621 67.457,4.621 68.957,4.621 65.957,5.371 68.957,5.371 65.957,6.121 68.957,6.121 65.957,6.871 68.957,6.871 65.957,7.621 67.457,7.621 68.957,7.621 65.957,44.501 67.457,44.501 68.957,44.501 65.957,45.251 68.957,45.251 65.957,46.001 68.957,46.001 65.957,46.751 68.957,46.751 65.957,47.501 67.457,47.501 68.957,47.501 65.957,84.381 67.457,84.381 68.957,84.381 65.957,85.131 68.957,85.131 65.957,85.881 68.957,85.881 65.957,86.631 68.957,86.631 65.957,87.381 67.457,87.381 68.957,87.381
VDCi_P: C1.1 C2.1 C3.1 C4.1 C5_P1.2 C5_P2.2 C5_P3.2 C6_P1.2 C6_P2.2 C6_P3.2 C7_P1.2 C7_P2.2 C7_P3.2 C8_P1.2 C8_P2.2 C8_P3.2 J5.1 J5.2 J5.3 J5.4 J5.5 J5.6 pad.3@48,118.65 Q1_P1.1 Q1_P2.1 Q1_P3.1 R4.2
VGDauxN__P1: C10_P1.1 C11_P1.1 J3_P1.1 J4_P1.2 R7_P1.1 R7_P1.2 U1_P1.5 | length 40.7
  Top Layer w0.5: J4_P1.2@87.104,88.63 87.104,100.826 90.216,103.938 J3_P1.1@90.659,103.938 ; C11_P1.1@98.551,86.053 105.26,86.053 U1_P1.5@107.355,88.148
  Top Layer w0.508: J4_P1.2@87.104,88.63 87.172,88.698 91.221,88.698 R7_P1.2@94.71,85.209 ; R7_P1.1@96.376,85.748 96.376,85.882 96.547,86.053 C11_P1.1@98.551,86.053
  Bottom Layer w0.508: U1_P1.5@107.355,88.148 107.355,87.975 108.92,86.41 C10_P1.1@109.02,86.41
VGDauxN__P2: C10_P2.1 C11_P2.1 J3_P2.1 J4_P2.2 R7_P2.1 R7_P2.2 U1_P2.5 | length 40.5
  Top Layer w0.5: J4_P2.2@87.104,48.75 87.104,60.946 90.216,64.058 J3_P2.1@90.659,64.058 ; C11_P2.1@98.551,46.173 104.46,46.173 106.555,48.268 U1_P2.5@107.355,48.268
  Top Layer w0.508: J4_P2.2@87.104,48.75 87.172,48.818 91.221,48.818 R7_P2.2@94.71,45.329 ; R7_P2.1@96.376,45.868 96.376,46.002 96.547,46.173 C11_P2.1@98.551,46.173
  Bottom Layer w0.5: U1_P2.5@107.355,48.268 108.2,48.268 109.209,47.259 C10_P2.1@109.309,47.259
VGDauxN__P3: C10_P3.1 C11_P3.1 J3_P3.1 J4_P3.2 R7_P3.1 R7_P3.2 U1_P3.5 | length 40.5
  Top Layer w0.5: J4_P3.2@87.104,8.87 87.104,21.066 90.216,24.178 J3_P3.1@90.659,24.178 ; C11_P3.1@98.551,6.293 104.46,6.293 106.555,8.388 U1_P3.5@107.355,8.388
  Top Layer w0.508: J4_P3.2@87.104,8.87 87.172,8.938 91.221,8.938 R7_P3.2@94.71,5.449 ; R7_P3.1@96.376,5.988 96.376,6.122 96.547,6.293 C11_P3.1@98.551,6.293
  Bottom Layer w0.5: U1_P3.5@107.355,8.388 108.2,8.388 109.209,7.379 C10_P3.1@109.309,7.379
VGDauxP__P1: C10_P1.2 C11_P1.2 R6_P1.2 U1_P1.7 | length 12.8
  Top Layer w0.5: R6_P1.2@96.276,83.288 96.368,83.196 98.458,83.196 C11_P1.2@98.551,83.103 ; C11_P1.2@98.791,83.048 106.535,83.048
  Bottom Layer w0.5: U1_P1.7@107.355,83.068 108.82,84.533 108.82,84.91 108.92,85.01 C10_P1.2@109.02,85.01
VGDauxP__P2: C10_P2.2 C11_P2.2 R6_P2.2 U1_P2.7 | length 14.6
  Top Layer w0.5: R6_P2.2@96.276,43.408 96.368,43.316 98.458,43.316 C11_P2.2@98.551,43.223 ; C11_P2.2@98.791,43.168 106.535,43.168 106.555,43.188 U1_P2.7@107.355,43.188
  Bottom Layer w0.5: U1_P2.7@107.716,43.046 107.716,43.272 107.828,43.384 108.054,43.384 109.109,44.439 109.109,45.759 109.209,45.859 C10_P2.2@109.309,45.859
VGDauxP__P3: C10_P3.2 C11_P3.2 R6_P3.2 U1_P3.7 | length 14.4
  Top Layer w0.5: R6_P3.2@96.276,3.528 96.368,3.436 98.458,3.436 C11_P3.2@98.551,3.343 ; C11_P3.2@98.791,3.288 106.535,3.288 106.555,3.308 U1_P3.7@107.355,3.308
  Bottom Layer w0.5: U1_P3.7@107.91,3.15 109.109,4.349 109.109,5.879 109.209,5.979 C10_P3.2@109.309,5.979
VGDinP__P1: C9_P1.2 L1_P1.2 U1_P1.1 | length 10.8
  Top Layer w1.016: U1_P1.1@107.355,98.308 110.395,98.308 110.935,98.848 L1_P1.2@110.935,99.682
  Bottom Layer w1.016: C9_P1.2@104.559,93.889 104.559,96.009 106.604,98.054 107.355,98.054 U1_P1.1@107.609,98.308
VGDinP__P2: C9_P2.2 L1_P2.2 U1_P2.1 | length 10.2
  Top Layer w1.016: 107.355,59.228 110.927,59.228 110.935,59.236 L1_P2.2@110.935,59.802
  Bottom Layer w1.016: C9_P2.2@104.559,54.009 104.559,56.409 106.324,58.174 107.101,58.174 U1_P2.1@107.355,58.428
VGDinP__P3: C9_P3.2 L1_P3.2 U1_P3.1 | length 10.4
  Top Layer w1.016: 107.355,19.348 110.927,19.348 110.935,19.356 L1_P3.2@110.935,19.922
  Bottom Layer w1.016: C9_P3.2@104.559,14.129 104.559,16.934 105.94,18.315 107.122,18.315 U1_P3.1@107.355,18.548
VGDoutM__P1: C9_P1.1 U1_P1.6 | length 5.5
  Bottom Layer w0.508: C9_P1.1@104.559,89.989 104.559,88.404 U1_P1.6@107.355,85.608
VGDoutM__P2: C9_P2.1 U1_P2.6 | length 4.5
  Bottom Layer w1.016: C9_P2.1@105.211,50.051 105.211,47.429 106.55,46.09
VGDoutM__P3: C9_P3.1 U1_P3.6 | length 4.8
  Bottom Layer w1.016: C9_P3.1@105.211,10.171 105.211,7.429 U1_P3.6@106.7,5.94
VGDoutP__P1: J3_P1.2 J4_P1.1 R6_P1.1 | length 31.4
  Top Layer w0.508: J3_P1.2@87.104,106.478 86.8,106.478 86.564,106.241 86.564,105.938 85.334,104.708 85.334,87.02 86.176,86.178 J4_P1.1@90.659,86.178 ; J4_P1.1@90.659,86.09 91.101,86.09 91.357,85.834 91.357,85.392 93.461,83.288 R6_P1.1@94.626,83.288
VGDoutP__P2: J3_P2.2 J4_P2.1 R6_P2.1 | length 31.4
  Top Layer w0.508: J3_P2.2@87.104,66.598 86.8,66.598 86.564,66.361 86.564,66.058 85.334,64.828 85.334,47.14 86.176,46.298 J4_P2.1@90.659,46.298 ; J4_P2.1@90.659,46.21 91.101,46.21 91.357,45.954 91.357,45.512 93.461,43.408 R6_P2.1@94.626,43.408
VGDoutP__P3: J3_P3.2 J4_P3.1 R6_P3.1 | length 31.4
  Top Layer w0.508: J3_P3.2@87.104,26.718 86.8,26.718 86.564,26.481 86.564,26.178 85.334,24.948 85.334,7.26 86.176,6.418 J4_P3.1@90.659,6.418 ; J4_P3.1@90.659,6.33 91.101,6.33 91.357,6.074 91.357,5.632 93.461,3.528 R6_P3.1@94.626,3.528
Vout: J6.1 J6.2 J6.3 J6.4 J6.5 J6.6 J6.7 J6.8 pad.3@8.09,102.66 pad.3@8.09,107.55 pad.3@8.18,112.44
pads on no net: MH1.* MH2.* MH3.* MH4.* MH5.* MH6.* Q1_P1.* Q1_P2.* Q1_P3.* Q2_P1.* Q2_P2.* Q2_P3.*

## Polygon pours and split planes (outlines as drawn)
Ph3 on Bottom Layer "Ph1_L-02_P-001" (solid, pour order 141): 71.677,30.708 71.677,15.278 96.135,15.278 107.9,24.328 107.9,40.29 88.214,40.29 78.632,30.708
Ph2 on Bottom Layer "Ph1_L-02_P-001" (solid, pour order 140): 71.677,70.588 71.677,55.158 96.135,55.158 107.925,64.227 107.925,80.17 88.214,80.17 78.632,70.588
Ph1 on Bottom Layer "Ph1_L-02_P-001" (solid, pour order 139): 71.677,110.468 71.677,95.038 96.135,95.038 107.9,104.088 107.9,120.05 88.214,120.05 78.632,110.468
VDCi_N on Bottom Layer "VDCi_N_P1_L-02_P-002" (solid, pour order 138): 66.444,0.64 56.414,0.64 56.414,40.55 66.45,40.55 67.271,39.729 67.271,10.534 69.717,10.534 69.717,3.913
VDCi_N on Bottom Layer "VDCi_N_P1_L-02_P-002" (solid, pour order 137): 66.444,40.52 56.414,40.52 56.414,80.42 66.49,80.42 67.271,79.639 67.271,50.414 69.717,50.414 69.717,43.793
VDCi_N on Bottom Layer "VDCi_N_P1_L-02_P-002" (solid, pour order 136): 66.444,80.4 56.414,80.4 56.414,120.24 65.71,120.24 67.271,118.679 67.271,90.294 69.717,90.294 69.717,83.673
VDCi_N on Bottom Layer "VDCi_N_L-02_P-001" (solid, pour order 120): 2.9,119.55 56.922,119.55 56.922,0.65 2.9,0.65
SShunt3 on Bottom Layer "SShunt1_L-02_P-001" (solid, pour order 135): 65.359,12.648 75.408,12.648 75.408,8.348 65.359,8.348
SShunt2 on Bottom Layer "SShunt1_L-02_P-001" (solid, pour order 134): 65.359,52.528 75.408,52.528 75.408,48.228 65.359,48.228
SShunt1 on Bottom Layer "SShunt1_L-02_P-001" (solid, pour order 133): 65.359,92.408 75.408,92.408 75.408,88.108 65.359,88.108
GND on Bottom Layer "GND_L02_P148" (solid, remove dead copper, pour order 148): 113.275,96.35 115,96.35 115,126.675 115,128.125 90.825,128.125 90.825,124.025 109.6,124.025 113.275,120.35
GND on Bottom Layer "GND_L02_P146" (solid, pour order 146): 106.593,96.675 106.593,94.95 110.95,94.95 113.1,92.8 113.1,56.775 106.593,56.775 106.593,55.05 110.1,55.05 113.1,52.05 113.1,17.05 106.25,17.05 106.25,15.21 115,15.21 115,96.675
VDCi_P on Top Layer "VDCi_P_P1_L-01_P-002" (solid, pour order 132): 56.414,40.52 56.414,0.64 59.713,0.64 59.713,31.473 61.57,33.33 75.611,33.33 76.854,34.573 76.854,39.29 75.624,40.52
VDCi_P on Top Layer "VDCi_P_P1_L-01_P-002" (solid, pour order 131): 56.414,80.39 56.414,40.52 59.713,40.52 59.713,71.353 61.57,73.21 75.611,73.21 76.854,74.453 76.854,79.17 75.634,80.39
VDCi_P on Top Layer "VDCi_P_P1_L-01_P-002" (solid, pour order 130): 56.414,120.16 56.414,80.4 59.713,80.4 59.713,111.233 61.57,113.09 75.611,113.09 76.854,114.333 76.854,119.05 75.744,120.16
VDCi_N on Top Layer "VDCI_N_L01_P143" (solid, pour order 143): 65.229,48.247 69.457,48.247 69.457,42.69 69.016,42.25 65.229,42.25
VDCi_N on Top Layer "VDCi_N_P1_L-01_P-002" (solid, pour order 125): 63.427,42.18 67.319,42.18 67.319,69.22 66.308,70.231 63.427,70.231
VDCi_N on Top Layer "VDCI_N_L01_P142" (solid, pour order 142): 65.229,88.127 69.457,88.127 69.457,82.57 68.675,81.79 65.229,81.79
VDCi_N on Top Layer "VDCi_N_P1_L-01_P-002" (solid, pour order 124): 63.427,81.79 67.319,81.79 67.319,109.1 66.308,110.111 63.427,110.111
VDCi_N on Top Layer "VDCI_N_L01_P144" (solid, pour order 144): 65.229,8.367 69.457,8.367 69.457,2.81 69.056,2.41 65.229,2.41
VDCi_N on Top Layer "VDCi_N_P1_L-01_P-002" (solid, pour order 126): 63.427,2.37 67.319,2.37 67.319,29.34 66.308,30.351 63.427,30.351
VDCi_P on Top Layer "VDCi_P_L-01_P-001" (solid, remove dead copper, pour order 119): 25.3,127.15 56.923,127.15 56.923,0.65 2.898,0.65 2.9,96.55 10.4,96.55 25.3,111.45
Vout on Top Layer "Vout_L-01_P-001" (solid, pour order 147): 15.2,127.15 25.3,127.15 25.3,111.95 10.01,96.66 2.9,96.66 2.9,114.85
VCC_24V on Top Layer "VCC_24V_L01_P149" (solid, remove dead copper, pour order 149): 90.875,128.15 90.875,124.05 115,124.05 115,128.15
Ph3 on Top Layer "Ph1_L-01_P-001" (solid, pour order 129): 71.677,30.69 71.677,15.278 78.372,15.278 79.164,16.07 79.164,30.11 78.584,30.69
Ph2 on Top Layer "Ph1_L-01_P-001" (solid, pour order 128): 71.677,70.57 71.677,55.158 78.372,55.158 79.164,55.95 79.164,69.99 78.584,70.57
Ph1 on Top Layer "Ph1_L-01_P-001" (solid, pour order 127): 71.677,110.45 71.677,95.038 78.372,95.038 79.164,95.83 79.164,109.87 78.584,110.45
SShunt3 on Top Layer "SShunt1_L-01_P-001" (solid, pour order 123): 65.36,12.628 75.408,12.628 75.408,7.828 65.36,7.828
SShunt2 on Top Layer "SShunt1_L-01_P-001" (solid, pour order 122): 65.36,52.508 75.408,52.508 75.408,47.708 65.36,47.708
SShunt1 on Top Layer "SShunt1_L-01_P-001" (solid, pour order 121): 65.36,92.388 75.408,92.388 75.408,87.588 65.36,87.588
VCC_24V on Top Layer "VCC_24V_L01_P145" (solid, pour order 145): 115,126.7 115,15.775 113.175,15.775 113.175,126.7

## Silkscreen, mask and mechanical layers (free items; w line width, h text height)
Top Overlay:
  text "VDC_P" at 44.754,121.258 h1.52
  text "Conv 3Ph 2L-Boost / v 2.0 - 2020 / AHWV/LSZ / F - IT18I0090" at 62.2,120.95 h1
  text "H" at 34.553,114.51 h12
  text "Vout" at 5.046,105.204 h1.52 r90
  text "H" at 77.673,94.055 h12
  text "H" at 3.478,86.485 h12
  text "H" at 77.448,54.03 h12
  text "H" at 3.353,30.71 h12
  text "VDC_N" at 4.892,22.204 h1.52 r90
  text "H" at 77.123,15.955 h12
Board:
  lines w0.254: 60.564,18.252 60.564,22.359 cw(c61.564,22.359) 62.564,22.359 ; 60.564,18.259 ccw(c61.564,18.259) 62.564,18.259 ; 60.564,58.132 60.564,62.239 cw(c61.564,62.239) 62.564,62.239 ; 60.564,58.139 ccw(c61.564,58.139) 62.564,58.139 ; 60.564,98.012 60.564,102.119 cw(c61.564,102.119) 62.564,102.119 ; 60.564,98.019 ccw(c61.564,98.019) 62.564,98.019 ; 60.584,25.568 60.584,29.668 ; 60.584,25.588 ccw(c61.584,25.588) 62.584,25.588 ; 60.584,29.688 cw(c61.584,29.688) 62.584,29.688 62.584,25.568 ; 60.584,65.448 60.584,69.548 ; 60.584,65.468 ccw(c61.584,65.468) 62.584,65.468 ; 60.584,69.568 cw(c61.584,69.568) 62.584,69.568 62.584,65.448 ; 60.584,105.328 60.584,109.428 ; 60.584,105.348 ccw(c61.584,105.348) 62.584,105.348 ; 60.584,109.448 cw(c61.584,109.448) 62.584,109.448 62.584,105.328 ; 60.601,10.683 ccw(c61.601,10.683) 62.601,10.683 ; 60.601,10.689 60.601,14.788 ; 60.601,14.783 cw(c61.601,14.783) 62.601,14.783 ; 60.601,50.563 ccw(c61.601,50.563) 62.601,50.563 ; 60.601,50.569 60.601,54.668 ; 60.601,54.663 cw(c61.601,54.663) 62.601,54.663 ; 60.601,90.443 ccw(c61.601,90.443) 62.601,90.443 ; 60.601,90.449 60.601,94.548 ; 60.601,94.543 cw(c61.601,94.543) 62.601,94.543 ; 62.564,18.252 62.564,22.352 ; 62.564,58.132 62.564,62.232 ; 62.564,98.012 62.564,102.112 ; 62.601,10.689 62.601,14.788 ; 62.601,50.569 62.601,54.668 ; 62.601,90.449 62.601,94.548 ; 115.241,0 6.271,0 2.25,0 ; 115.25,0 115.25,117.25 115.25,128.45 101.05,128.45 0,128.45 0,0 2.25,0 ; 2.25,0 2.25,0 ; 60.571,3.147 ccw(c61.571,3.147) 62.571,3.147 62.571,7.246 ccw(c61.571,7.246) 60.571,7.246 60.571,3.147 ; 60.571,43.027 ccw(c61.571,43.027) 62.571,43.027 62.571,47.126 ccw(c61.571,47.126) 60.571,47.126 60.571,43.027 ; 60.571,82.907 ccw(c61.571,82.907) 62.571,82.907 62.571,87.006 ccw(c61.571,87.006) 60.571,87.006 60.571,82.907 ; 66.798,40.87 cw(c66.798,41.87) 66.798,42.87 76.723,42.87 cw(c76.723,41.87) 76.723,40.87 66.798,40.87 ; 66.912,80.74 cw(c66.912,81.74) 66.912,82.74 76.837,82.74 cw(c76.837,81.74) 76.837,80.74 66.912,80.74 ; 67.472,22.035 ccw(c68.472,22.035) 69.472,22.035 69.472,28.035 ccw(c68.472,28.035) 67.472,28.035 67.472,22.035 ; 67.472,61.915 ccw(c68.472,61.915) 69.472,61.915 69.472,67.915 ccw(c68.472,67.915) 67.472,67.915 67.472,61.915 ; 67.472,101.795 ccw(c68.472,101.795) 69.472,101.795 69.472,107.795 ccw(c68.472,107.795) 67.472,107.795 67.472,101.795 ; 70.567,12.834 cw(c70.567,13.834) 70.567,14.834 75.867,14.834 cw(c75.867,13.834) 75.867,12.834 70.567,12.834 ; 70.567,52.714 cw(c70.567,53.714) 70.567,54.714 75.867,54.714 cw(c75.867,53.714) 75.867,52.714 70.567,52.714 ; 70.567,92.594 cw(c70.567,93.594) 70.567,94.594 75.867,94.594 cw(c75.867,93.594) 75.867,92.594 70.567,92.594 ; 70.577,30.961 cw(c70.577,31.961) 70.577,32.961 75.877,32.961 cw(c75.877,31.961) 75.877,30.961 70.577,30.961 ; 70.577,70.841 cw(c70.577,71.841) 70.577,72.841 75.877,72.841 cw(c75.877,71.841) 75.877,70.841 70.577,70.841 ; 70.577,110.721 cw(c70.577,111.721) 70.577,112.721 75.877,112.721 cw(c75.877,111.721) 75.877,110.721 70.577,110.721 ; 110.021,3.361 ccw(c111.021,3.361) 112.021,3.361 112.021,14.361 ccw(c111.021,14.361) 110.021,14.361 110.021,3.361 ; 110.021,43.241 ccw(c111.021,43.241) 112.021,43.241 112.021,54.241 ccw(c111.021,54.241) 110.021,54.241 110.021,43.241 ; 110.021,83.121 ccw(c111.021,83.121) 112.021,83.121 112.021,94.121 ccw(c111.021,94.121) 110.021,94.121 110.021,83.121

## Dimensions
85,125.45 to 0,128.45 on Dimensions
3,125.45 to 0,128.45 on Dimensions
3,125.45 to 0,128.45 on Dimensions
0,0 to 3,3 on Dimensions
3,3 to 0,0 on Dimensions
0,0 to 0,128.45 on Dimensions
106.019,114.39 to 115.247,119.052 on Dimensions